# Altium PCB PWR_PCB.PcbDoc (part 2 of 3)
Units mil, origin at the board's own origin, x right, y up, seen from the top; angles counter-clockwise.
Board outline 9000 x 6000 mil, 4 copper layers (Top Layer, GND Layer, Power Layer, Bottom Layer), stack 61.811 mil thick; 125 components, 92 nets, 479 pads, 4387 vias.
Unrouted connection lines stored in the file: 22.
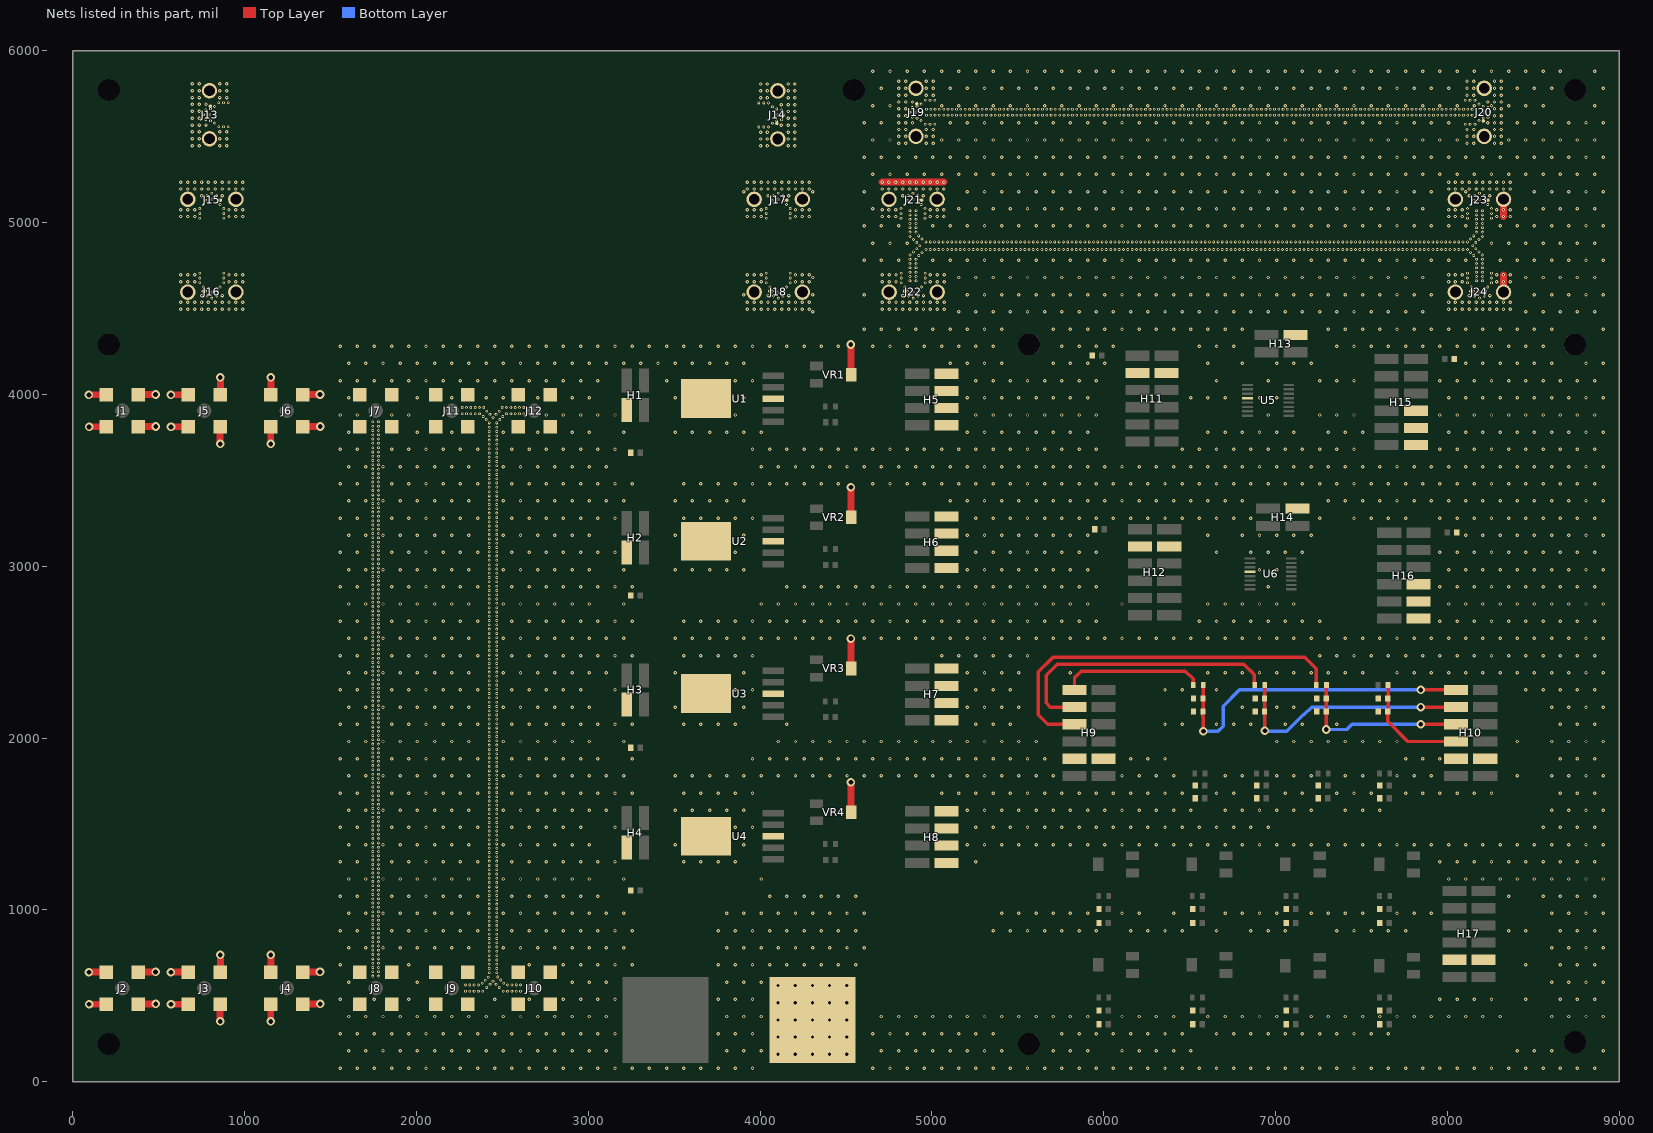
[diagram p4: the nets of this part, all layers, seen from the top]

## Via types
v1: diameter 20, hole 9, Top Layer to Bottom Layer, tented both sides, 2529 vias
v2: diameter 16, hole 8, Top Layer to Bottom Layer, 1158 vias
v3: diameter 20, hole 8, Top Layer to Bottom Layer, tented both sides, 408 vias
v4: diameter 16, hole 8, Top Layer to Bottom Layer, tented both sides, 156 vias
v5: diameter 50, hole 28, Top Layer to Bottom Layer, 70 vias
v6: diameter 30, hole 19, Top Layer to Bottom Layer, 50 vias
v7: diameter 80, hole 50, Top Layer to Bottom Layer, 16 vias

## Nets (pads, with @x,y where several pads share a name; then routed paths per layer and width w, separated by ;. In a path a pad name is that pad's centre, name@x,y a point inside that pad or via, vN(x,y) a via of type N, cw(c..) or ccw(c..) an arc to the next point about the centre after c; other vN are vias at no path point) (continued)
GND: C1.1 C2.1 C3.1 C4.1 C9.1 C10.1 C11.1 C12.1 C13.1 C14.1 C15.1 C16.1 C17.1 C18.1 C19.1 C20.1 C21.1 C22.1 C23.1 C24.1 C25.1 C26.1 C27.1 C28.1 C29.1 C30.1 C31.1 C32.1 C33.1 C34.1 C35.1 C36.1 C37.1 C38.1 C39.1 C40.1 C41.1 C42.1 C43.1 C44.1 H1.1 H2.1 H3.1 H4.1 H5.1 H5.3 H5.5 H5.7 H6.1 H6.3 H6.5 H6.7 H7.1 H7.3 H7.5 H7.7 H8.1 H8.3 H8.5 H8.7 H9.5 H9.11 H10.5 H10.11 H11.5 H11.11 H12.5 H12.11 H13.3 H14.3 H15.1 H15.2 H15.3 H16.1 H16.2 H16.3 H17.5 H17.11 J1.2 J1.3 J1.4 J1.5 J2.2 J2.3 J2.4 J2.5 J3.2 J3.3 J3.4 J3.5 J4.2 J4.3 J4.4 J4.5 J5.2 J5.3 J5.4 J5.5 J6.2 J6.3 J6.4 J6.5 J7.2 J7.3 J7.4 J7.5 J8.2 J8.3 J8.4 J8.5 J9.2 J9.3 J9.4 J9.5 J10.2 J10.3 J10.4 J10.5 J11.2 J11.3 J11.4 J11.5 J12.2 J12.3 J12.4 J12.5 J13.1 J13.2 J13.4 J14.1 J14.2 J14.4 J15.1 J15.2 J15.4 J16.1 J16.2 J16.4 J17.1 J17.2 J17.4 J18.1 J18.2 J18.4 J19.1 J19.2 J19.4 J20.1 J20.2 J20.4 J21.1 J21.2 J21.4 J22.1 J22.2 J22.4 J23.1 J23.2 J23.4 J24.1 J24.2 J24.4 P2.1 U1.3 U1.6 U2.3 U2.6 U3.3 U3.6 U4.3 U4.6 U5.12 U6.12 VR1.2 VR2.2 VR3.2 VR4.2 | length 3672.3
  Top Layer w40: v5(94.75,637) 95.5,637.75 194.75,637.75 J2.2@195.5,638.5 ; v5(94.75,3997) 95.5,3997.75 194.75,3997.75 J1.2@195.5,3998.5 ; v5(95.5,450.75) 96.25,451.5 J2.5@195.5,451.5 ; v5(95.5,3810.75) 96.25,3811.5 J1.5@195.5,3811.5 ; J2.4@382.5,451.5 383.25,452.25 482.5,452.25 v5(483.25,453) ; J2.3@382.5,638.5 481.75,638.5 v5(482.5,639.25) ; J1.4@382.5,3811.5 383.25,3812.25 482.5,3812.25 v5(483.25,3813) ; J1.3@382.5,3998.5 481.75,3998.5 v5(482.5,3999.25) ; v5(571.75,637) 572.5,637.75 671.75,637.75 J3.3@672.5,638.5 ; v5(571.75,3997) 572.5,3997.75 671.75,3997.75 J5.3@672.5,3998.5 ; v5(572.5,450.75) 573.25,451.5 J3.2@672.5,451.5 ; v5(572.5,3810.75) 573.25,3811.5 J5.2@672.5,3811.5 ; J3.5@858.52,451.5 858.52,352.25 v5(859.27,351.5) ; J5.5@858.52,3811.5 858.52,3712.25 v5(859.27,3711.5) ; v5(858.75,738.5) 859.5,737.75 J3.4@859.5,638.5 ; v5(858.75,4098.5) 859.5,4097.75 J5.4@859.5,3998.5 ; J4.2@1152.5,451.5 1152.5,352.25 v5(1153.25,351.5) ; J6.2@1152.5,3811.5 1152.5,3712.25 v5(1153.25,3711.5) ; v5(1152.73,738.5) 1153.48,737.75 J4.3@1153.48,638.5 ; v5(1152.73,4098.5) 1153.48,4097.75 J6.3@1153.48,3998.5 ; J4.5@1339.5,451.5 1340.25,452.25 1439.5,452.25 v5(1440.25,453) ; J4.4@1339.5,638.5 1438.75,638.5 v5(1439.5,639.25) ; J6.5@1339.5,3811.5 1340.25,3812.25 1439.5,3812.25 v5(1440.25,3813) ; J6.4@1339.5,3998.5 1438.75,3998.5 v5(1439.5,3999.25) ; v5(4527.5,4290) 4528.48,4289.02 4528.48,4115.98 VR1.2@4529.47,4115 ; VR4.2@4529.47,1568.92 v5@4529.47,1741.95 ; VR3.2@4529.47,2405 v5@4529.47,2578.03 ; VR2.2@4529.47,3285 v5@4529.47,3458.03 ; v3(4710,5235) v3(4750,5235) v3(4790,5235) v3(4830,5235) v3(4870,5235) v3(4910,5235) v3(4950,5235) v3(4990,5235) v3(5030,5235) v3(5070,5235) ; J21.4@4750,5135 J21.4@4750.5,5134.5 ; J22.1@4750.5,4595.5 J22.1@4751,4595 ; J24.4@8326,4595 v3(8326,4655) v3(8326,4695) ; v3(8326,5035) v3(8326,5075) J23.1@8326,5135
  other v1: 1556,80 1656,80 1756,80 1856,80 1956,80 2056,80 2156,80 2256,80 2356,80 2456,80 2556,80 2656,80 2756,80 2856,80 2956,80 3056,80 3156,80 3256,80 3356,80 3456,80 3556,80 3656,80 3756,80 3856,80 3956,80 4656,80 4756,80 4856,80 4956,80 5056,80 5156,80 5256,80 5356,80 5456,80 5556,80 5656,80 5756,80 5856,80 5956,80 6056,80 6156,80 6256,80 6356,80 6456,80 6556,80 6656,80 6756,80 6856,80 6956,80 7056,80 7156,80 7256,80 7356,80 7456,80 7556,80 7656,80 7756,80 7856,80 7956,80 8056,80 8156,80 8256,80 8356,80 8456,80 8556,80 8656,80 8756,80 8856,80 1606,180 1706,180 1806,180 1906,180 2006,180 2106,180 2206,180 2306,180 2406,180 2506,180 2606,180 2706,180 2806,180 2906,180 3006,180 3106,180 3806,180 3906,180 4006,180 4706,180 4806,180 4906,180 5006,180 5106,180 5206,180 5306,180 5406,180 5706,180 5806,180 5906,180 6106,180 6206,180 6306,180 6406,180 6506,180 8406,180 8506,180 8606,180 8906,180 1556,280 1656,280 1756,280 1856,280 1956,280 2056,280 2156,280 2256,280 2356,280 2456,280 2556,280 2656,280 2756,280 2856,280 2956,280 3056,280 3156,280 3756,280 3856,280 3956,280 4656,280 4756,280 4856,280 4956,280 5056,280 5156,280 5256,280 5356,280 5756,280 5856,280 5956,280 6056,280 6156,280 6256,280 6356,280 6456,280 6656,280 6756,280 6856,280 6956,280 7056,280 7156,280 7256,280 7356,280 7456,280 7556,280 7656,280 1606,380 1706,380 1806,380 1906,380 2006,380 2106,380 2206,380 2306,380 2406,380 2506,380 2606,380 2706,380 2806,380 2906,380 3006,380 3106,380 3806,380 3906,380 4006,380 4706,380 4806,380 4906,380 5006,380 5106,380 5206,380 5306,380 5406,380 5506,380 5606,380 5706,380 5806,380 5906,380 6106,380 6206,380 6306,380 6406,380 6606,380 6706,380 6806,380 6906,380 7006,380 7206,380 7306,380 7406,380 7506,380 7606,380 7706,380 7806,380 7906,380 8006,380 8106,380 8206,380 8306,380 8606,380 8706,380 8806,380 8906,380 1556,480 1756,480 1956,480 2456,480 2656,480 2856,480 2956,480 3056,480 3156,480 3756,480 3856,480 3956,480 7956,480 8056,480 8156,480 8256,480 8456,480 8656,480 8756,480 8856,480 1606,580 2006,580 2906,580 3006,580 3106,580 3806,580 3906,580 4006,580 8606,580 8706,580 8806,580 8906,580 1556,680 1956,680 2656,680 2856,680 2956,680 3056,680 3156,680 3256,680 3756,680 3856,680 3956,680 4056,680 4156,680 4256,680 4356,680 4456,680 4556,680 8456,680 8656,680 8756,680 8856,680 1606,780 1706,780 1806,780 1906,780 2006,780 2106,780 2206,780 2306,780 2506,780 2606,780 2706,780 2806,780 2906,780 3006,780 3106,780 3206,780 3806,780 3906,780 4006,780 4106,780 4206,780 4306,780 4406,780 4506,780 4606,780 8606,780 8706,780 8806,780 8906,780 1556,880 1656,880 1856,880 1956,880 2056,880 2156,880 2256,880 2356,880 2556,880 2656,880 2756,880 2856,880 2956,880 3056,880 3156,880 3256,880 3756,880 3856,880 3956,880 4056,880 4156,880 4256,880 4356,880 4456,880 4556,880 5356,880 5456,880 5556,880 5656,880 5756,880 5856,880 5956,880 6156,880 6256,880 6356,880 6456,880 6656,880 6856,880 6956,880 7056,880 7356,880 7456,880 7556,880 7656,880 7756,880 8356,880 8456,880 8656,880 8756,880 8856,880 1606,980 1706,980 1806,980 1906,980 2006,980 2106,980 2206,980 2306,980 2506,980 2606,980 2706,980 2806,980 2906,980 3006,980 3106,980 3206,980 3806,980 3906,980 4006,980 4106,980 4206,980 4306,980 4406,980 4506,980 4606,980 5406,980 5506,980 5606,980 5706,980 5806,980 5906,980 6106,980 6206,980 6406,980 6706,980 6806,980 6906,980 7006,980 7206,980 7306,980 7406,980 7506,980 7706,980 7806,980 7906,980 8606,980 8706,980 8806,980 8906,980 1556,1080 1656,1080 1856,1080 1956,1080 2056,1080 2156,1080 2256,1080 2356,1080 2556,1080 2656,1080 2756,1080 2856,1080 2956,1080 3056,1080 4056,1080 4156,1080 4256,1080 4356,1080 4456,1080 4556,1080 8356,1080 8556,1080 8656,1080 8756,1080 8856,1080 1606,1180 1706,1180 1806,1180 1906,1180 2006,1180 2106,1180 2206,1180 2306,1180 2506,1180 2606,1180 2706,1180 2806,1180 2906,1180 3006,1180 3206,1180 4006,1180 8006,1180 8106,1180 8206,1180 8306,1180 8406,1180 8506,1180 8606,1180 8706,1180 8806,1180 8906,1180 1556,1280 1656,1280 1856,1280 1956,1280 2056,1280 2156,1280 2256,1280 2356,1280 2556,1280 2656,1280 2756,1280 2856,1280 2956,1280 3056,1280 3156,1280 3556,1280 3656,1280 3756,1280 3856,1280 5256,1280 7956,1280 8056,1280 8156,1280 8256,1280 8356,1280 8456,1280 8556,1280 8656,1280 8756,1280 8856,1280 1606,1380 1706,1380 1806,1380 1906,1380 2006,1380 2106,1380 2206,1380 2306,1380 2506,1380 2606,1380 2706,1380 2806,1380 2906,1380 3006,1380 3506,1380 3906,1380 5206,1380 5306,1380 5406,1380 5506,1380 5606,1380 5706,1380 5806,1380 5906,1380 6006,1380 6106,1380 6206,1380 6306,1380 6406,1380 6506,1380 6606,1380 6706,1380 6806,1380 6906,1380 7006,1380 7106,1380 7206,1380 7306,1380 7406,1380 7506,1380 7606,1380 7706,1380 7806,1380 7906,1380 8006,1380 8106,1380 8206,1380 8306,1380 8406,1380 8506,1380 8606,1380 8706,1380 8806,1380 8906,1380 1556,1480 1656,1480 1856,1480 1956,1480 2056,1480 2156,1480 2256,1480 2356,1480 2556,1480 2656,1480 2756,1480 2856,1480 2956,1480 3156,1480 3856,1480 3956,1480 5256,1480 5356,1480 5456,1480 5556,1480 5656,1480 5756,1480 5856,1480 5956,1480 6056,1480 6156,1480 6256,1480 6356,1480 6456,1480 6556,1480 6656,1480 6756,1480 6856,1480 6956,1480 8556,1480 8656,1480 8756,1480 8856,1480 1606,1580 1706,1580 1806,1580 1906,1580 2006,1580 2106,1580 2206,1580 2306,1580 2506,1580 2606,1580 2706,1580 2806,1580 2906,1580 3006,1580 3106,1580 3506,1580 3606,1580 3706,1580 3806,1580 3906,1580 5206,1580 5306,1580 5406,1580 5506,1580 5606,1580 5706,1580 5806,1580 5906,1580 6006,1580 6106,1580 6206,1580 6306,1580 6406,1580 6506,1580 6706,1580 6806,1580 6906,1580 7006,1580 7106,1580 7206,1580 7406,1580 7506,1580 7606,1580 8606,1580 8706,1580 8806,1580 8906,1580 1556,1680 1656,1680 1856,1680 1956,1680 2056,1680 2156,1680 2256,1680 2356,1680 2556,1680 2656,1680 2756,1680 2856,1680 2956,1680 3056,1680 3156,1680 3256,1680 3556,1680 3656,1680 3756,1680 3856,1680 3956,1680 5056,1680 5156,1680 5256,1680 5356,1680 5456,1680 5556,1680 5656,1680 5756,1680 5856,1680 5956,1680 6056,1680 6156,1680 6256,1680 6356,1680 6456,1680 6656,1680 6756,1680 7056,1680 7156,1680 7356,1680 7456,1680 7556,1680 7756,1680 7856,1680 7956,1680 8056,1680 8156,1680 8256,1680 8656,1680 8756,1680 8856,1680 1606,1780 1706,1780 1806,1780 1906,1780 2006,1780 2106,1780 2206,1780 2306,1780 2506,1780 2606,1780 2706,1780 2806,1780 2906,1780 3006,1780 3106,1780 3206,1780 3506,1780 3606,1780 3706,1780 3806,1780 3906,1780 4006,1780 4106,1780 4206,1780 4306,1780 4406,1780 4506,1780 4606,1780 4706,1780 4806,1780 4906,1780 5006,1780 5106,1780 5206,1780 5306,1780 5406,1780 5506,1780 5606,1780 5706,1780 6106,1780 6206,1780 6306,1780 6406,1780 6706,1780 6806,1780 7006,1780 7106,1780 7206,1780 7406,1780 7506,1780 7706,1780 7806,1780 7906,1780 8406,1780 8606,1780 8706,1780 8806,1780 8906,1780 1556,1880 1656,1880 1856,1880 1956,1880 2056,1880 2156,1880 2256,1880 2356,1880 2556,1880 2656,1880 2756,1880 2856,1880 2956,1880 3056,1880 3256,1880 3956,1880 4056,1880 4156,1880 4256,1880 4356,1880 4456,1880 4556,1880 4656,1880 4756,1880 4856,1880 4956,1880 5056,1880 5156,1880 5256,1880 5356,1880 5456,1880 5556,1880 5656,1880 6156,1880 6256,1880 6356,1880 7756,1880 7856,1880 7956,1880 8656,1880 8756,1880 8856,1880 1606,1980 1706,1980 1806,1980 1906,1980 2006,1980 2106,1980 2206,1980 2306,1980 2506,1980 2606,1980 2706,1980 2806,1980 2906,1980 3006,1980 3206,1980 4106,1980 4206,1980 4306,1980 4406,1980 4506,1980 4606,1980 4706,1980 4806,1980 4906,1980 5006,1980 5106,1980 5206,1980 5306,1980 5406,1980 5506,1980 5606,1980 7006,1980 7106,1980 7206,1980 7306,1980 7406,1980 7506,1980 7606,1980 7706,1980 8406,1980 8606,1980 8706,1980 8806,1980 8906,1980 1556,2080 1656,2080 1856,2080 1956,2080 2056,2080 2156,2080 2256,2080 2356,2080 2556,2080 2656,2080 2756,2080 2856,2080 2956,2080 3056,2080 3156,2080 3256,2080 3556,2080 3656,2080 3756,2080 3856,2080 4156,2080 5256,2080 5356,2080 5456,2080 6356,2080 6456,2080 6656,2080 6756,2080 6856,2080 7056,2080 7156,2080 7356,2080 8656,2080 8756,2080 8856,2080 1606,2180 1706,2180 1806,2180 1906,2180 2006,2180 2106,2180 2206,2180 2306,2180 2506,2180 2606,2180 2706,2180 2806,2180 2906,2180 3006,2180 3506,2180 3906,2180 5206,2180 5306,2180 5406,2180 5506,2180 6806,2180 7006,2180 7106,2180 8606,2180 8706,2180 8806,2180 8906,2180 1556,2280 1656,2280 1856,2280 1956,2280 2056,2280 2156,2280 2256,2280 2356,2280 2556,2280 2656,2280 2756,2280 2856,2280 2956,2280 3156,2280 3856,2280 3956,2280 5256,2280 5356,2280 5456,2280 6356,2280 6456,2280 6656,2280 8456,2280 8556,2280 8656,2280 8756,2280 8856,2280 1606,2380 1706,2380 1806,2380 1906,2380 2006,2380 2106,2380 2206,2380 2306,2380 2506,2380 2606,2380 2706,2380 2806,2380 2906,2380 3006,2380 3106,2380 3506,2380 3906,2380 5206,2380 5306,2380 5406,2380 5506,2380 5806,2380 6606,2380 6706,2380 6806,2380 6906,2380 7006,2380 7106,2380 7206,2380 7306,2380 7406,2380 7506,2380 7706,2380 7806,2380 7906,2380 8006,2380 8106,2380 8206,2380 8306,2380 8406,2380 8506,2380 8606,2380 8706,2380 8806,2380 8906,2380 1556,2480 1656,2480 1856,2480 1956,2480 2056,2480 2156,2480 2256,2480 2356,2480 2556,2480 2656,2480 2756,2480 2856,2480 2956,2480 3056,2480 3156,2480 3256,2480 3556,2480 3656,2480 3756,2480 3856,2480 3956,2480 5056,2480 5156,2480 5256,2480 5356,2480 5456,2480 5556,2480 7256,2480 7356,2480 7456,2480 7556,2480 7656,2480 7756,2480 7856,2480 7956,2480 8056,2480 8156,2480 8256,2480 8356,2480 8456,2480 8556,2480 8656,2480 8756,2480 8856,2480 1606,2580 1706,2580 1806,2580 1906,2580 2006,2580 2106,2580 2206,2580 2306,2580 2506,2580 2606,2580 2706,2580 2806,2580 2906,2580 3006,2580 3106,2580 3206,2580 3506,2580 3606,2580 3706,2580 3806,2580 3906,2580 4006,2580 4106,2580 4206,2580 4306,2580 4406,2580 4606,2580 4706,2580 4806,2580 4906,2580 5006,2580 5106,2580 5206,2580 5306,2580 5406,2580 5506,2580 5606,2580 5706,2580 5806,2580 5906,2580 6006,2580 6106,2580 6206,2580 6306,2580 6406,2580 6506,2580 6606,2580 6706,2580 6806,2580 6906,2580 7006,2580 7106,2580 7206,2580 7306,2580 7406,2580 7506,2580 7606,2580 7706,2580 7806,2580 7906,2580 8006,2580 8106,2580 8206,2580 8306,2580 8406,2580 8506,2580 8606,2580 8706,2580 8806,2580 8906,2580 1556,2680 1656,2680 1856,2680 1956,2680 2056,2680 2156,2680 2256,2680 2356,2680 2556,2680 2656,2680 2756,2680 2856,2680 2956,2680 3056,2680 3156,2680 3256,2680 3556,2680 3656,2680 3756,2680 3856,2680 3956,2680 4056,2680 4156,2680 4256,2680 4356,2680 4456,2680 4556,2680 4656,2680 4756,2680 4856,2680 4956,2680 5056,2680 5156,2680 5256,2680 5356,2680 5456,2680 5556,2680 5656,2680 5756,2680 5856,2680 5956,2680 6556,2680 6656,2680 6756,2680 6856,2680 6956,2680 7056,2680 7156,2680 7256,2680 7956,2680 8056,2680 8156,2680 8256,2680 8356,2680 8456,2680 8556,2680 8656,2680 8756,2680 8856,2680 1606,2780 1706,2780 1806,2780 1906,2780 2006,2780 2106,2780 2206,2780 2306,2780 2506,2780 2606,2780 2706,2780 2806,2780 2906,2780 3006,2780 3206,2780 4006,2780 4106,2780 4206,2780 4306,2780 4406,2780 4506,2780 4606,2780 4706,2780 4806,2780 4906,2780 5006,2780 5106,2780 5206,2780 5306,2780 5406,2780 5506,2780 5606,2780 5706,2780 5806,2780 5906,2780 6106,2780 6606,2780 6706,2780 6806,2780 6906,2780 7006,2780 7106,2780 8006,2780 8106,2780 8206,2780 8306,2780 8406,2780 8506,2780 8606,2780 8706,2780 8806,2780 8906,2780 1556,2880 1656,2880 1856,2880 1956,2880 2056,2880 2156,2880 2256,2880 2356,2880 2556,2880 2656,2880 2756,2880 2856,2880 2956,2880 3056,2880 3156,2880 3256,2880 4156,2880 4256,2880 4356,2880 4456,2880 4556,2880 4656,2880 4756,2880 4856,2880 4956,2880 5056,2880 5156,2880 5256,2880 5356,2880 5456,2880 5556,2880 5656,2880 5756,2880 5856,2880 5956,2880 6956,2880 7956,2880 8056,2880 8156,2880 8256,2880 8356,2880 8456,2880 8556,2880 8656,2880 8756,2880 8856,2880 1606,2980 1706,2980 1806,2980 1906,2980 2006,2980 2106,2980 2206,2980 2306,2980 2506,2980 2606,2980 2706,2980 2806,2980 2906,2980 3006,2980 3206,2980 3506,2980 3606,2980 3706,2980 3806,2980 3906,2980 5206,2980 5306,2980 5406,2980 5506,2980 5606,2980 5706,2980 5806,2980 5906,2980 6906,2980 7006,2980 8006,2980 8106,2980 8206,2980 8306,2980 8406,2980 8506,2980 8606,2980 8706,2980 8806,2980 8906,2980 1556,3080 1656,3080 1856,3080 1956,3080 2056,3080 2156,3080 2256,3080 2356,3080 2556,3080 2656,3080 2756,3080 2856,3080 2956,3080 3056,3080 3156,3080 3856,3080 5256,3080 5356,3080 5456,3080 5556,3080 5656,3080 5756,3080 5856,3080 5956,3080 6656,3080 6856,3080 6956,3080 7056,3080 7156,3080 7956,3080 8056,3080 8156,3080 8256,3080 8356,3080 8456,3080 8556,3080 8656,3080 8756,3080 8856,3080 1606,3180 1706,3180 1806,3180 1906,3180 2006,3180 2106,3180 2206,3180 2306,3180 2506,3180 2606,3180 2706,3180 2806,3180 2906,3180 3006,3180 3506,3180 3906,3180 5206,3180 5306,3180 5406,3180 5506,3180 5606,3180 5706,3180 5806,3180 5906,3180 6606,3180 6806,3180 6906,3180 7006,3180 7106,3180 7206,3180 8106,3180 8206,3180 8306,3180 8406,3180 8506,3180 8606,3180 8706,3180 8806,3180 8906,3180 1556,3280 1656,3280 1856,3280 1956,3280 2056,3280 2156,3280 2256,3280 2356,3280 2556,3280 2656,3280 2756,3280 2856,3280 2956,3280 3056,3280 3156,3280 3556,3280 3656,3280 3756,3280 3856,3280 3956,3280 5256,3280 5356,3280 5456,3280 5556,3280 5656,3280 5756,3280 5856,3280 5956,3280 6056,3280 6156,3280 6256,3280 6356,3280 6456,3280 6556,3280 6656,3280 6756,3280 6856,3280 7256,3280 7456,3280 7556,3280 7656,3280 7756,3280 7956,3280 8056,3280 8156,3280 8256,3280 8356,3280 8456,3280 8556,3280 8656,3280 8756,3280 8856,3280 1606,3380 1706,3380 1806,3380 1906,3380 2006,3380 2106,3380 2206,3380 2306,3380 2506,3380 2606,3380 2706,3380 2806,3380 2906,3380 3006,3380 3106,3380 3206,3380 3506,3380 3606,3380 3706,3380 3806,3380 3906,3380 5106,3380 5206,3380 5306,3380 5406,3380 5506,3380 5606,3380 5706,3380 5806,3380 5906,3380 6006,3380 6106,3380 6206,3380 6306,3380 6406,3380 6506,3380 6606,3380 6706,3380 6806,3380 7306,3380 7406,3380 7506,3380 7606,3380 7706,3380 7806,3380 7906,3380 8006,3380 8106,3380 8206,3380 8306,3380 8406,3380 8506,3380 8606,3380 8706,3380 8806,3380 8906,3380 1556,3480 1656,3480 1856,3480 1956,3480 2056,3480 2156,3480 2256,3480 2356,3480 2556,3480 2656,3480 2756,3480 2856,3480 2956,3480 3056,3480 3156,3480 3256,3480 3556,3480 3656,3480 3756,3480 3856,3480 3956,3480 4056,3480 4156,3480 4256,3480 4356,3480 4456,3480 4656,3480 4756,3480 4856,3480 4956,3480 5056,3480 5156,3480 5256,3480 5356,3480 5456,3480 5556,3480 5656,3480 5756,3480 5856,3480 5956,3480 6056,3480 6156,3480 6256,3480 6356,3480 6456,3480 6556,3480 6656,3480 6756,3480 6856,3480 6956,3480 7056,3480 7156,3480 7256,3480 7356,3480 7456,3480 7556,3480 7656,3480 7756,3480 7856,3480 7956,3480 8056,3480 8156,3480 8256,3480 8356,3480 8456,3480 8556,3480 8656,3480 8756,3480 8856,3480 1606,3580 1706,3580 1806,3580 1906,3580 2006,3580 2106,3580 2206,3580 2306,3580 2506,3580 2606,3580 2706,3580 2806,3580 2906,3580 3006,3580 3106,3580 4006,3580 4106,3580 4206,3580 4306,3580 4406,3580 4506,3580 4606,3580 4706,3580 4806,3580 4906,3580 5006,3580 5106,3580 5206,3580 5306,3580 5406,3580 5506,3580 5606,3580 5706,3580 5806,3580 5906,3580 6006,3580 6106,3580 6206,3580 6306,3580 6406,3580 6506,3580 6606,3580 6706,3580 6806,3580 6906,3580 7006,3580 7106,3580 7206,3580 7306,3580 7406,3580 7506,3580 7606,3580 7706,3580 7806,3580 7906,3580 8006,3580 8106,3580 8206,3580 8306,3580 8406,3580 8506,3580 8606,3580 8706,3580 8806,3580 8906,3580 1556,3680 1656,3680 1856,3680 1956,3680 2056,3680 2156,3680 2256,3680 2356,3680 2556,3680 2656,3680 2756,3680 2856,3680 2956,3680 3056,3680 3156,3680 3956,3680 4056,3680 4156,3680 4256,3680 4356,3680 4456,3680 4556,3680 4656,3680 4756,3680 4856,3680 4956,3680 5056,3680 5156,3680 5256,3680 5356,3680 5456,3680 5556,3680 5656,3680 5756,3680 5856,3680 5956,3680 6456,3680 6556,3680 6656,3680 6756,3680 6856,3680 6956,3680 7056,3680 7156,3680 7256,3680 7356,3680 7456,3680 7956,3680 8056,3680 8156,3680 8256,3680 8356,3680 8456,3680 8556,3680 8656,3680 8756,3680 8856,3680 1606,3780 2006,3780 2206,3780 2506,3780 2706,3780 2906,3780 3006,3780 3206,3780 3506,3780 3606,3780 3706,3780 3806,3780 3906,3780 4006,3780 5206,3780 5306,3780 5406,3780 5506,3780 5606,3780 5706,3780 5806,3780 5906,3780 6606,3780 6706,3780 6806,3780 6906,3780 7006,3780 7106,3780 7306,3780 7406,3780 7506,3780 8006,3780 8106,3780 8206,3780 8306,3780 8406,3780 8506,3780 8606,3780 8706,3780 8806,3780 8906,3780 1556,3880 1656,3880 1856,3880 1956,3880 2756,3880 2856,3880 2956,3880 3056,3880 3156,3880 3856,3880 5256,3880 5356,3880 5456,3880 5556,3880 5656,3880 5756,3880 5856,3880 5956,3880 6956,3880 7256,3880 7356,3880 7456,3880 7956,3880 8056,3880 8156,3880 8256,3880 8356,3880 8456,3880 8556,3880 8656,3880 8756,3880 8856,3880 1606,3980 2006,3980 2206,3980 2406,3980 2506,3980 2706,3980 2906,3980 3006,3980 3506,3980 3906,3980 5206,3980 5306,3980 5406,3980 5506,3980 5606,3980 5706,3980 5806,3980 5906,3980 6506,3980 6606,3980 6706,3980 6906,3980 7006,3980 8006,3980 8106,3980 8206,3980 8306,3980 8406,3980 8506,3980 8606,3980 8706,3980 8806,3980 8906,3980 1556,4080 1656,4080 1756,4080 1856,4080 1956,4080 2056,4080 2156,4080 2256,4080 2356,4080 2456,4080 2556,4080 2656,4080 2756,4080 2856,4080 2956,4080 3056,4080 3456,4080 3856,4080 3956,4080 5256,4080 5356,4080 5456,4080 5556,4080 5656,4080 5756,4080 5856,4080 5956,4080 6656,4080 6956,4080 7256,4080 7356,4080 7456,4080 7956,4080 8056,4080 8156,4080 8256,4080 8356,4080 8456,4080 8556,4080 8656,4080 8756,4080 8856,4080 1606,4180 1706,4180 1806,4180 1906,4180 2006,4180 2106,4180 2206,4180 2306,4180 2406,4180 2506,4180 2606,4180 2706,4180 2806,4180 2906,4180 3006,4180 3106,4180 3206,4180 3306,4180 3406,4180 3506,4180 3606,4180 3706,4180 3806,4180 3906,4180 5106,4180 5206,4180 5306,4180 5406,4180 5706,4180 5806,4180 5906,4180 6006,4180 6606,4180 6806,4180 7006,4180 7106,4180 7206,4180 8106,4180 8206,4180 8306,4180 8406,4180 8506,4180 8606,4180 8806,4180 8906,4180 1556,4280 1656,4280 1756,4280 1856,4280 1956,4280 2056,4280 2156,4280 2256,4280 2356,4280 2456,4280 2556,4280 2656,4280 2756,4280 2856,4280 2956,4280 3056,4280 3156,4280 3256,4280 3356,4280 3456,4280 3556,4280 3656,4280 3756,4280 3856,4280 3956,4280 4056,4280 4156,4280 4256,4280 4356,4280 4456,4280 4656,4280 4756,4280 4856,4280 4956,4280 5056,4280 5156,4280 5256,4280 5356,4280 5756,4280 5856,4280 5956,4280 6056,4280 6556,4280 6656,4280 6756,4280 7356,4280 7456,4280 7556,4280 7656,4280 7756,4280 7856,4280 7956,4280 8056,4280 8156,4280 8256,4280 8356,4280 8456,4280 8556,4280 4606,4380 4706,4380 4806,4380 4906,4380 5006,4380 5106,4380 5206,4380 5306,4380 5406,4380 5706,4380 5806,4380 5906,4380 6006,4380 6106,4380 6206,4380 6306,4380 6406,4380 6506,4380 6606,4380 6706,4380 6806,4380 7306,4380 7406,4380 7506,4380 7606,4380 7706,4380 7806,4380 7906,4380 8006,4380 8106,4380 8206,4380 8306,4380 8406,4380 8506,4380 8606,4380 8906,4380 4306,4480 5156,4480 5256,4480 5356,4480 5456,4480 5556,4480 5656,4480 5756,4480 5856,4480 5956,4480 6056,4480 6156,4480 6256,4480 6356,4480 6456,4480 6556,4480 6656,4480 6756,4480 6856,4480 6956,4480 7056,4480 7156,4480 7256,4480 7356,4480 7456,4480 7556,4480 7656,4480 7756,4480 7856,4480 8456,4480 8556,4480 8656,4480 8756,4480 8856,4480 3906,4580 4306,4580 4606,4580 5206,4580 5306,4580 5406,4580 5506,4580 5606,4580 5706,4580 5806,4580 5906,4580 6006,4580 6106,4580 6206,4580 6306,4580 6406,4580 6506,4580 6606,4580 6706,4580 6806,4580 6906,4580 7006,4580 7106,4580 7206,4580 7306,4580 7406,4580 7506,4580 7606,4580 7706,4580 7806,4580 7906,4580 8506,4580 8606,4580 8706,4580 8806,4580 8906,4580 4306,4680 5156,4680 5256,4680 5356,4680 5456,4680 5556,4680 5656,4680 5756,4680 5856,4680 5956,4680 6056,4680 6156,4680 6256,4680 6356,4680 6456,4680 6556,4680 6656,4680 6756,4680 6856,4680 6956,4680 7056,4680 7156,4680 7256,4680 7356,4680 7456,4680 7556,4680 7656,4680 7756,4680 7856,4680 8456,4680 8556,4680 8656,4680 8756,4680 8856,4680 4606,4780 4706,4780 4806,4780 5006,4780 5106,4780 5206,4780 5306,4780 5406,4780 5506,4780 5606,4780 5706,4780 5806,4780 5906,4780 6006,4780 6106,4780 6206,4780 6306,4780 6406,4780 6506,4780 6606,4780 6706,4780 6806,4780 6906,4780 7006,4780 7106,4780 7206,4780 7306,4780 7406,4780 7506,4780 7606,4780 7706,4780 7806,4780 7906,4780 8006,4780 8106,4780 8306,4780 8406,4780 8506,4780 8606,4780 8706,4780 8806,4780 8906,4780 4656,4880 4756,4880 4856,4880 8256,4880 8356,4880 8456,4880 8556,4880 8656,4880 8756,4880 8856,4880 4606,4980 4706,4980 4806,4980 5006,4980 5106,4980 5206,4980 5306,4980 5406,4980 5506,4980 5606,4980 5706,4980 5806,4980 5906,4980 6006,4980 6106,4980 6206,4980 6306,4980 6406,4980 6506,4980 6606,4980 6706,4980 6806,4980 6906,4980 7006,4980 7106,4980 7206,4980 7306,4980 7406,4980 7506,4980 7606,4980 7706,4980 7806,4980 7906,4980 8006,4980 8106,4980 8306,4980 8406,4980 8506,4980 8606,4980 8706,4980 8806,4980 8906,4980 4656,5080 5156,5080 5256,5080 5356,5080 5456,5080 5556,5080 5656,5080 5756,5080 5856,5080 5956,5080 6056,5080 6156,5080 6256,5080 6356,5080 6456,5080 6556,5080 6656,5080 6756,5080 6856,5080 6956,5080 7056,5080 7156,5080 7256,5080 7356,5080 7456,5080 7556,5080 7656,5080 7756,5080 7856,5080 8456,5080 8556,5080 8656,5080 8756,5080 8856,5080 3906,5180 4306,5180 4606,5180 5206,5180 5306,5180 5406,5180 5506,5180 5606,5180 5706,5180 5806,5180 5906,5180 6006,5180 6106,5180 6206,5180 6306,5180 6406,5180 6506,5180 6606,5180 6706,5180 6806,5180 6906,5180 7006,5180 7106,5180 7206,5180 7306,5180 7406,5180 7506,5180 7606,5180 7706,5180 7806,5180 7906,5180 8106,5180 8506,5180 8606,5180 8706,5180 8806,5180 8906,5180 4656,5280 4756,5280 4856,5280 4956,5280 5056,5280 5156,5280 5256,5280 5356,5280 5456,5280 5556,5280 5656,5280 5756,5280 5856,5280 5956,5280 6056,5280 6156,5280 6256,5280 6356,5280 6456,5280 6556,5280 6656,5280 6756,5280 6856,5280 6956,5280 7056,5280 7156,5280 7256,5280 7356,5280 7456,5280 7556,5280 7656,5280 7756,5280 7856,5280 7956,5280 8056,5280 8156,5280 8256,5280 8356,5280 8456,5280 8556,5280 8656,5280 8756,5280 8856,5280 4606,5380 4706,5380 4806,5380 4906,5380 5006,5380 5106,5380 5206,5380 5306,5380 5406,5380 5506,5380 5606,5380 5706,5380 5806,5380 5906,5380 6006,5380 6106,5380 6206,5380 6306,5380 6406,5380 6506,5380 6606,5380 6706,5380 6806,5380 6906,5380 7006,5380 7106,5380 7206,5380 7306,5380 7406,5380 7506,5380 7606,5380 7706,5380 7806,5380 7906,5380 8006,5380 8106,5380 8206,5380 8306,5380 8406,5380 8506,5380 8606,5380 8706,5380 8806,5380 8906,5380 4656,5480 4756,5480 5056,5480 5156,5480 5256,5480 5356,5480 5456,5480 5556,5480 5656,5480 5756,5480 5856,5480 5956,5480 6056,5480 6156,5480 6256,5480 6356,5480 6456,5480 6556,5480 6656,5480 6756,5480 6856,5480 6956,5480 7056,5480 7156,5480 7256,5480 7356,5480 7456,5480 7556,5480 7656,5480 7756,5480 7856,5480 7956,5480 8056,5480 8356,5480 8456,5480 8556,5480 8656,5480 8756,5480 8856,5480 4606,5580 4706,5580 5106,5580 5206,5580 5306,5580 5406,5580 5506,5580 5606,5580 5706,5580 5806,5580 5906,5580 6006,5580 6106,5580 6206,5580 6306,5580 6406,5580 6506,5580 6606,5580 6706,5580 6806,5580 6906,5580 7006,5580 7106,5580 7206,5580 7306,5580 7406,5580 7506,5580 7606,5580 7706,5580 7806,5580 7906,5580 8006,5580 8406,5580 8506,5580 8606,5580 8706,5580 8806,5580 8906,5580 4656,5680 4756,5680 5056,5680 5156,5680 5256,5680 5356,5680 5456,5680 5556,5680 5656,5680 5756,5680 5856,5680 5956,5680 6056,5680 6156,5680 6256,5680 6356,5680 6456,5680 6556,5680 6656,5680 6756,5680 6856,5680 6956,5680 7056,5680 7156,5680 7256,5680 7356,5680 7456,5680 7556,5680 7656,5680 7756,5680 7856,5680 7956,5680 8056,5680 8156,5680 8256,5680 8356,5680 8456,5680 8556,5680 8856,5680 4706,5780 5106,5780 5206,5780 5306,5780 5406,5780 5506,5780 5606,5780 5706,5780 5806,5780 5906,5780 6006,5780 6106,5780 6206,5780 6306,5780 6406,5780 6506,5780 6606,5780 6706,5780 6806,5780 6906,5780 7006,5780 7106,5780 7206,5780 7306,5780 7406,5780 7506,5780 7606,5780 7706,5780 7806,5780 7906,5780 8006,5780 8406,5780 8506,5780 8606,5780 8906,5780 4656,5880 4756,5880 4856,5880 4956,5880 5056,5880 5156,5880 5256,5880 5356,5880 5456,5880 5556,5880 5656,5880 5756,5880 5856,5880 5956,5880 6056,5880 6156,5880 6256,5880 6356,5880 6456,5880 6556,5880 6656,5880 6756,5880 6856,5880 6956,5880 7056,5880 7156,5880 7256,5880 7356,5880 7456,5880 7556,5880 7656,5880 7756,5880 7856,5880 7956,5880 8056,5880 8156,5880 8256,5880 8356,5880 8456,5880 8556,5880 8656,5880 8856,5880
  other v2: 2286,527 2311,527 2336,527 2361,527 2386,527 2506,527 2531,527 2556,527 2581,527 2606,527 2410,549 2482,549 2286,563 2311,563 2336,563 2361,563 2531,563 2556,563 2581,563 2606,563 2428,567 2464,567 2383,573 2509,574 2446,585 2401,591 2491,592 2419,609 2473,610 1745.75,615 1780.25,615 2424,634 2468,634 1745.75,640 1780.25,640 2424,659 2468,659 1745.75,665 1780.25,665 2424,684 2468,684 1745.75,690 1780.25,690 2424,709 2468,709 1745.75,715 1780.25,715 2424,734 2468,734 1745.75,740 1780.25,740 2424,759 2468,759 1745.75,765 1780.25,765 2424,784 2468,784 1745.75,790 1780.25,790 2424,809 2468,809 1745.75,815 1780.25,815 2424,834 2468,834 1745.75,840 1780.25,840 2424,859 2468,859 1745.75,865 1780.25,865 2424,884 2468,884 1745.75,890 1780.25,890 2424,909 2468,909 1745.75,915 1780.25,915 2424,934 2468,934 1745.75,940 1780.25,940 2424,959 2468,959 1745.75,965 1780.25,965 2424,984 2468,984 1745.75,990 1780.25,990 2424,1009 2468,1009 1745.75,1015 1780.25,1015 2424,1034 2468,1034 1745.75,1040 1780.25,1040 2424,1059 2468,1059 1745.75,1065 1780.25,1065 2424,1084 2468,1084 1745.75,1090 1780.25,1090 2424,1109 2468,1109 1745.75,1115 1780.25,1115 2424,1134 2468,1134 1745.75,1140 1780.25,1140 2424,1159 2468,1159 1745.75,1165 1780.25,1165 2424,1184 2468,1184 1745.75,1190 1780.25,1190 2424,1209 2468,1209 1745.75,1215 1780.25,1215 2424,1234 2468,1234 1745.75,1240 1780.25,1240 2424,1259 2468,1259 1745.75,1265 1780.25,1265 2424,1284 2468,1284 1745.75,1290 1780.25,1290 2424,1309 2468,1309 1745.75,1315 1780.25,1315 2424,1334 2468,1334 1745.75,1340 1780.25,1340 2424,1359 2468,1359 1745.75,1365 1780.25,1365 2424,1384 2468,1384 1745.75,1390 1780.25,1390 2424,1409 2468,1409 1745.75,1415 1780.25,1415 2424,1434 2468,1434 1745.75,1440 1780.25,1440 2424,1459 2468,1459 1745.75,1465 1780.25,1465 2424,1484 2468,1484 1745.75,1490 1780.25,1490 2424,1509 2468,1509 1745.75,1515 1780.25,1515 2424,1534 2468,1534 1745.75,1540 1780.25,1540 2424,1559 2468,1559 1745.75,1565 1780.25,1565 2424,1584 2468,1584 1745.75,1590 1780.25,1590 2424,1609 2468,1609 1745.75,1615 1780.25,1615 2424,1634 2468,1634 1745.75,1640 1780.25,1640 2424,1659 2468,1659 1745.75,1665 1780.25,1665 2424,1684 2468,1684 1745.75,1690 1780.25,1690 2424,1709 2468,1709 1745.75,1715 1780.25,1715 2424,1734 2468,1734 1745.75,1740 1780.25,1740 2424,1759 2468,1759 1745.75,1765 1780.25,1765 2424,1784 2468,1784 1745.75,1790 1780.25,1790 2424,1809 2468,1809 1745.75,1815 1780.25,1815 2424,1834 2468,1834 1745.75,1840 1780.25,1840 2424,1859 2468,1859 1745.75,1865 1780.25,1865 2424,1884 2468,1884 1745.75,1890 1780.25,1890 2424,1909 2468,1909 1745.75,1915 1780.25,1915 2424,1934 2468,1934 1745.75,1940 1780.25,1940 2424,1959 2468,1959 1745.75,1965 1780.25,1965 2424,1984 2468,1984 1745.75,1990 1780.25,1990 2424,2009 2468,2009 1745.75,2015 1780.25,2015 2424,2034 2468,2034 1745.75,2040 1780.25,2040 2424,2059 2468,2059 1745.75,2065 1780.25,2065 2424,2084 2468,2084 1745.75,2090 1780.25,2090 2424,2109 2468,2109 1745.75,2115 1780.25,2115 2424,2134 2468,2134 1745.75,2140 1780.25,2140 2424,2159 2468,2159 1745.75,2165 1780.25,2165 2424,2184 2468,2184 1745.75,2190 1780.25,2190 2424,2209 2468,2209 1745.75,2215 1780.25,2215 2424,2234 2468,2234 1745.75,2240 1780.25,2240 2424,2259 2468,2259 1745.75,2265 1780.25,2265 2424,2284 2468,2284 1745.75,2290 1780.25,2290 2424,2309 2468,2309 1745.75,2315 1780.25,2315 2424,2334 2468,2334 1745.75,2340 1780.25,2340 2424,2359 2468,2359 1745.75,2365 1780.25,2365 2424,2384 2468,2384 1745.75,2390 1780.25,2390 2424,2409 2468,2409 1745.75,2415 1780.25,2415 2424,2434 2468,2434 1745.75,2440 1780.25,2440 2424,2459 2468,2459 1745.75,2465 1780.25,2465 2424,2484 2468,2484 1745.75,2490 1780.25,2490 2424,2509 2468,2509 1745.75,2515 1780.25,2515 2424,2534 2468,2534 1745.75,2540 1780.25,2540 2424,2559 2468,2559 1745.75,2565 1780.25,2565 2424,2584 2468,2584 1745.75,2590 1780.25,2590 2424,2609 2468,2609 1745.75,2615 1780.25,2615 2424,2634 2468,2634 1745.75,2640 1780.25,2640 2424,2659 2468,2659 1745.75,2665 1780.25,2665 2424,2684 2468,2684 1745.75,2690 1780.25,2690 2424,2709 2468,2709 1745.75,2715 1780.25,2715 2424,2734 2468,2734 1745.75,2740 1780.25,2740 2424,2759 2468,2759 1745.75,2765 1780.25,2765 2424,2784 2468,2784 1745.75,2790 1780.25,2790 2424,2809 2468,2809 1745.75,2815 1780.25,2815 2424,2834 2468,2834 1745.75,2840 1780.25,2840 2424,2859 2468,2859 1745.75,2865 1780.25,2865 2424,2884 2468,2884 1745.75,2890 1780.25,2890 2424,2909 2468,2909 1745.75,2915 1780.25,2915 2424,2934 2468,2934 1745.75,2940 1780.25,2940 2424,2959 2468,2959 1745.75,2965 1780.25,2965 2424,2984 2468,2984 1745.75,2990 1780.25,2990 2424,3009 2468,3009 1745.75,3015 1780.25,3015 2424,3034 2468,3034 1745.75,3040 1780.25,3040 2424,3059 2468,3059 1745.75,3065 1780.25,3065 2424,3084 2468,3084 1745.75,3090 1780.25,3090 2424,3109 2468,3109 1745.75,3115 1780.25,3115 2424,3134 2468,3134 1745.75,3140 1780.25,3140 2424,3159 2468,3159 1745.75,3165 1780.25,3165 2424,3184 2468,3184 1745.75,3190 1780.25,3190 2424,3209 2468,3209 1745.75,3215 1780.25,3215 2424,3234 2468,3234 1745.75,3240 1780.25,3240 2424,3259 2468,3259 1745.75,3265 1780.25,3265 2424,3284 2468,3284 1745.75,3290 1780.25,3290 2424,3309 2468,3309 1745.75,3315 1780.25,3315 2424,3334 2468,3334 1745.75,3340 1780.25,3340 2424,3359 2468,3359 1745.75,3365 1780.25,3365 2424,3384 2468,3384 1745.75,3390 1780.25,3390 2424,3409 2468,3409 1745.75,3415 1780.25,3415 2424,3434 2468,3434 1745.75,3440 1780.25,3440 2424,3459 2468,3459 1745.75,3465 1780.25,3465 2424,3484 2468,3484 1745.75,3490 1780.25,3490 2424,3509 2468,3509 1745.75,3515 1780.25,3515 2424,3534 2468,3534 1745.75,3540 1780.25,3540 2424,3559 2468,3559 1745.75,3565 1780.25,3565 2424,3584 2468,3584 1745.75,3590 1780.25,3590 2424,3609 2468,3609 1745.75,3615 1780.25,3615 2424,3634 2468,3634 1745.75,3640 1780.25,3640 2424,3659 2468,3659 1745.75,3665 1780.25,3665 2424,3684 2468,3684 1745.75,3690 1780.25,3690 2424,3709 2468,3709 1745.75,3715 1780.25,3715 2424,3734 2468,3734 1745.75,3740 1780.25,3740 2424,3759 2468,3759 1745.75,3765 1780.25,3765 2424,3784 2468,3784 1745.75,3790 1780.25,3790 2424,3809 2468,3809 1745.75,3815 1780.25,3815 2424,3834 2468,3834 1745.75,3840 1780.25,3840 2407,3853 2485,3853 2446,3866 2389,3871 2503,3871 2428,3884 2464,3884 2267,3887 2292,3887 2317,3887 2342,3887 2367,3887 2525,3887 2550,3887 2575,3887 2600,3887 2625,3887 2410,3902 2482,3902 2267,3923 2292,3923 2317,3923 2342,3923 2367,3923 2392,3923 2500,3923 2525,3923 2550,3923 2575,3923 2600,3923 2625,3923 4872,4661 4908,4661 8168,4661 8204,4661 4872,4686 4908,4686 8168,4686 8204,4686 4872,4711 4908,4711 8168,4711 8204,4711 4872,4736 4908,4736 8168,4736 8204,4736 4872,4761 4908,4761 8168,4761 8204,4761 4872,4786 4908,4786 8168,4786 8204,4786 4924,4808 8152,4808 4872,4811 8204,4811 4942,4826 8134,4826 4893,4829 8183,4829 4965,4843 4990,4843 5015,4843 5040,4843 5065,4843 5090,4843 5115,4843 5140,4843 5165,4843 5190,4843 5215,4843 5240,4843 5265,4843 5290,4843 5315,4843 5340,4843 5365,4843 5390,4843 5415,4843 5440,4843 5465,4843 5490,4843 5515,4843 5540,4843 5565,4843 5590,4843 5615,4843 5640,4843 5665,4843 5690,4843 5715,4843 5740,4843 5765,4843 5790,4843 5815,4843 5840,4843 5865,4843 5890,4843 5915,4843 5940,4843 5965,4843 5990,4843 6015,4843 6040,4843 6065,4843 6090,4843 6115,4843 6140,4843 6165,4843 6190,4843 6215,4843 6240,4843 6265,4843 6290,4843 6315,4843 6340,4843 6365,4843 6390,4843 6415,4843 6440,4843 6465,4843 6490,4843 6515,4843 6540,4843 6565,4843 6590,4843 6615,4843 6640,4843 6665,4843 6690,4843 6715,4843 6740,4843 6765,4843 6790,4843 6815,4843 6840,4843 6865,4843 6890,4843 6915,4843 6940,4843 6965,4843 6990,4843 7015,4843 7040,4843 7065,4843 7090,4843 7115,4843 7140,4843 7165,4843 7190,4843 7215,4843 7240,4843 7265,4843 7290,4843 7315,4843 7340,4843 7365,4843 7390,4843 7415,4843 7440,4843 7465,4843 7490,4843 7515,4843 7540,4843 7565,4843 7590,4843 7615,4843 7640,4843 7665,4843 7690,4843 7715,4843 7740,4843 7765,4843 7790,4843 7815,4843 7840,4843 7865,4843 7890,4843 7915,4843 7940,4843 7965,4843 7990,4843 8015,4843 8040,4843 8065,4843 8090,4843 8116,4843 4911,4847 8165,4847 4929,4865 8147,4865 4911,4883 8165,4883 4965,4887 4990,4887 5015,4887 5040,4887 5065,4887 5090,4887 5115,4887 5140,4887 5165,4887 5190,4887 5215,4887 5240,4887 5265,4887 5290,4887 5315,4887 5340,4887 5365,4887 5390,4887 5415,4887 5440,4887 5465,4887 5490,4887 5515,4887 5540,4887 5565,4887 5590,4887 5615,4887 5640,4887 5665,4887 5690,4887 5715,4887 5740,4887 5765,4887 5790,4887 5815,4887 5840,4887 5865,4887 5890,4887 5915,4887 5940,4887 5965,4887 5990,4887 6015,4887 6040,4887 6065,4887 6090,4887 6115,4887 6140,4887 6165,4887 6190,4887 6215,4887 6240,4887 6265,4887 6290,4887 6315,4887 6340,4887 6365,4887 6390,4887 6415,4887 6440,4887 6465,4887 6490,4887 6515,4887 6540,4887 6565,4887 6590,4887 6615,4887 6640,4887 6665,4887 6690,4887 6715,4887 6740,4887 6765,4887 6790,4887 6815,4887 6840,4887 6865,4887 6890,4887 6915,4887 6940,4887 6965,4887 6990,4887 7015,4887 7040,4887 7065,4887 7090,4887 7115,4887 7140,4887 7165,4887 7190,4887 7215,4887 7240,4887 7265,4887 7290,4887 7315,4887 7340,4887 7365,4887 7390,4887 7415,4887 7440,4887 7465,4887 7490,4887 7515,4887 7540,4887 7565,4887 7590,4887 7615,4887 7640,4887 7665,4887 7690,4887 7715,4887 7740,4887 7765,4887 7790,4887 7815,4887 7840,4887 7865,4887 7890,4887 7915,4887 7940,4887 7965,4887 7990,4887 8015,4887 8040,4887 8065,4887 8090,4887 8116,4887 4893,4901 8183,4901 4942,4904 8134,4904 4872,4919 8204,4919 4924,4922 8152,4922 4872,4944 4908,4944 8168,4944 8204,4944 4872,4969 4908,4969 8168,4969 8204,4969 4872,4994 4908,4994 8168,4994 8204,4994 4872,5019 4908,5019 8168,5019 8204,5019 4872,5044 4908,5044 8168,5044 8204,5044 4872,5069 4908,5069 8168,5069 8204,5069 4968.25,5623.75 4993.25,5623.75 5018.25,5623.75 5043.25,5623.75 5068.25,5623.75 5093.25,5623.75 5118.25,5623.75 5143.25,5623.75 5168.25,5623.75 5193.25,5623.75 5218.25,5623.75 5243.25,5623.75 5268.25,5623.75 5293.25,5623.75 5318.25,5623.75 5343.25,5623.75 5368.25,5623.75 5393.25,5623.75 5418.25,5623.75 5443.25,5623.75 5468.25,5623.75 5493.25,5623.75 5518.25,5623.75 5543.25,5623.75 5568.25,5623.75 5593.25,5623.75 5618.25,5623.75 5643.25,5623.75 5668.25,5623.75 5693.25,5623.75 5718.25,5623.75 5743.25,5623.75 5768.25,5623.75 5793.25,5623.75 5818.25,5623.75 5843.25,5623.75 5868.25,5623.75 5893.25,5623.75 5918.25,5623.75 5943.25,5623.75 5968.25,5623.75 5993.25,5623.75 6018.25,5623.75 6043.25,5623.75 6068.25,5623.75 6093.25,5623.75 6118.25,5623.75 6143.25,5623.75 6168.25,5623.75 6193.25,5623.75 6218.25,5623.75 6243.25,5623.75 6268.25,5623.75 6293.25,5623.75 6318.25,5623.75 6343.25,5623.75 6368.25,5623.75 6393.25,5623.75 6418.25,5623.75 6443.25,5623.75 6468.25,5623.75 6493.25,5623.75 6518.25,5623.75 6543.25,5623.75 6568.25,5623.75 6593.25,5623.75 6618.25,5623.75 6643.25,5623.75 6668.25,5623.75 6693.25,5623.75 6718.25,5623.75 6743.25,5623.75 6768.25,5623.75 6793.25,5623.75 6818.25,5623.75 6843.25,5623.75 6868.25,5623.75 6893.25,5623.75 6918.25,5623.75 6943.25,5623.75 6968.25,5623.75 6993.25,5623.75 7018.25,5623.75 7043.25,5623.75 7068.25,5623.75 7093.25,5623.75 7118.25,5623.75 7143.25,5623.75 7168.25,5623.75 7193.25,5623.75 7218.25,5623.75 7243.25,5623.75 7268.25,5623.75 7293.25,5623.75 7318.25,5623.75 7343.25,5623.75 7368.25,5623.75 7393.25,5623.75 7418.25,5623.75 7443.25,5623.75 7468.25,5623.75 7493.25,5623.75 7518.25,5623.75 7543.25,5623.75 7568.25,5623.75 7593.25,5623.75 7618.25,5623.75 7643.25,5623.75 7668.25,5623.75 7693.25,5623.75 7718.25,5623.75 7743.25,5623.75 7768.25,5623.75 7793.25,5623.75 7818.25,5623.75 7843.25,5623.75 7868.25,5623.75 7893.25,5623.75 7918.25,5623.75 7943.25,5623.75 7968.25,5623.75 7993.25,5623.75 8018.25,5623.75 8043.25,5623.75 8068.25,5623.75 8093.25,5623.75 8118.25,5623.75 8143.25,5623.75 4968.25,5658.25 4993.25,5658.25 5018.25,5658.25 5043.25,5658.25 5068.25,5658.25 5093.25,5658.25 5118.25,5658.25 5143.25,5658.25 5168.25,5658.25 5193.25,5658.25 5218.25,5658.25 5243.25,5658.25 5268.25,5658.25 5293.25,5658.25 5318.25,5658.25 5343.25,5658.25 5368.25,5658.25 5393.25,5658.25 5418.25,5658.25 5443.25,5658.25 5468.25,5658.25 5493.25,5658.25 5518.25,5658.25 5543.25,5658.25 5568.25,5658.25 5593.25,5658.25 5618.25,5658.25 5643.25,5658.25 5668.25,5658.25 5693.25,5658.25 5718.25,5658.25 5743.25,5658.25 5768.25,5658.25 5793.25,5658.25 5818.25,5658.25 5843.25,5658.25 5868.25,5658.25 5893.25,5658.25 5918.25,5658.25 5943.25,5658.25 5968.25,5658.25 5993.25,5658.25 6018.25,5658.25 6043.25,5658.25 6068.25,5658.25 6093.25,5658.25 6118.25,5658.25 6143.25,5658.25 6168.25,5658.25 6193.25,5658.25 6218.25,5658.25 6243.25,5658.25 6268.25,5658.25 6293.25,5658.25 6318.25,5658.25 6343.25,5658.25 6368.25,5658.25 6393.25,5658.25 6418.25,5658.25 6443.25,5658.25 6468.25,5658.25 6493.25,5658.25 6518.25,5658.25 6543.25,5658.25 6568.25,5658.25 6593.25,5658.25 6618.25,5658.25 6643.25,5658.25 6668.25,5658.25 6693.25,5658.25 6718.25,5658.25 6743.25,5658.25 6768.25,5658.25 6793.25,5658.25 6818.25,5658.25 6843.25,5658.25 6868.25,5658.25 6893.25,5658.25 6918.25,5658.25 6943.25,5658.25 6968.25,5658.25 6993.25,5658.25 7018.25,5658.25 7043.25,5658.25 7068.25,5658.25 7093.25,5658.25 7118.25,5658.25 7143.25,5658.25 7168.25,5658.25 7193.25,5658.25 7218.25,5658.25 7243.25,5658.25 7268.25,5658.25 7293.25,5658.25 7318.25,5658.25 7343.25,5658.25 7368.25,5658.25 7393.25,5658.25 7418.25,5658.25 7443.25,5658.25 7468.25,5658.25 7493.25,5658.25 7518.25,5658.25 7543.25,5658.25 7568.25,5658.25 7593.25,5658.25 7618.25,5658.25 7643.25,5658.25 7668.25,5658.25 7693.25,5658.25 7718.25,5658.25 7743.25,5658.25 7768.25,5658.25 7793.25,5658.25 7818.25,5658.25 7843.25,5658.25 7868.25,5658.25 7893.25,5658.25 7918.25,5658.25 7943.25,5658.25 7968.25,5658.25 7993.25,5658.25 8018.25,5658.25 8043.25,5658.25 8068.25,5658.25 8093.25,5658.25 8118.25,5658.25 8143.25,5658.25
  other v3: 630,4495 670,4495 710,4495 750,4495 790,4495 830,4495 870,4495 910,4495 950,4495 990,4495 3926,4495 3966,4495 4006,4495 4046,4495 4086,4495 4126,4495 4166,4495 4206,4495 4246,4495 4286,4495 4711,4495 4751,4495 4791,4495 4831,4495 4871,4495 4911,4495 4951,4495 4991,4495 5031,4495 5071,4495 8006,4495 8046,4495 8086,4495 8126,4495 8166,4495 8206,4495 8246,4495 8286,4495 8326,4495 8366,4495 630,4535 670,4535 710,4535 750,4535 790,4535 830,4535 870,4535 910,4535 950,4535 990,4535 3926,4535 3966,4535 4006,4535 4046,4535 4086,4535 4126,4535 4166,4535 4206,4535 4246,4535 4286,4535 4711,4535 4751,4535 4791,4535 4831,4535 4871,4535 4911,4535 4951,4535 4991,4535 5031,4535 5071,4535 8006,4535 8046,4535 8086,4535 8126,4535 8166,4535 8206,4535 8246,4535 8286,4535 8326,4535 8366,4535 750,4575 870,4575 4046,4575 4166,4575 4831,4575 4951,4575 8126,4575 8246,4575 630,4655 670,4655 710,4655 910,4655 950,4655 990,4655 3926,4655 3966,4655 4006,4655 4206,4655 4246,4655 4286,4655 4711,4655 4751,4655 4791,4655 4991,4655 5031,4655 5071,4655 8006,4655 8046,4655 8086,4655 8286,4655 8366,4655 630,4695 670,4695 710,4695 910,4695 950,4695 990,4695 3926,4695 3966,4695 4006,4695 4206,4695 4246,4695 4286,4695 4711,4695 4751,4695 4791,4695 4991,4695 5031,4695 5071,4695 8006,4695 8046,4695 8086,4695 8286,4695 8366,4695 630,5035 670,5035 710,5035 910,5035 950,5035 990,5035 3926,5035 3966,5035 4006,5035 4206,5035 4246,5035 4286,5035 4710,5035 4750,5035 4790,5035 4990,5035 5030,5035 5070,5035 8006,5035 8046,5035 8086,5035 8286,5035 8366,5035 630,5075 670,5075 710,5075 910,5075 950,5075 990,5075 3926,5075 3966,5075 4006,5075 4206,5075 4246,5075 4286,5075 4710,5075 4750,5075 4790,5075 4990,5075 5030,5075 5070,5075 8006,5075 8046,5075 8086,5075 8286,5075 8366,5075 750,5155 870,5155 4046,5155 4166,5155 4830,5155 4950,5155 8126,5155 8246,5155 630,5195 670,5195 710,5195 750,5195 790,5195 830,5195 870,5195 910,5195 950,5195 990,5195 3926,5195 3966,5195 4006,5195 4046,5195 4086,5195 4126,5195 4166,5195 4206,5195 4246,5195 4286,5195 4710,5195 4750,5195 4790,5195 4830,5195 4870,5195 4910,5195 4950,5195 4990,5195 5030,5195 5070,5195 8006,5195 8046,5195 8086,5195 8126,5195 8166,5195 8206,5195 8246,5195 8286,5195 8326,5195 8366,5195 630,5235 670,5235 710,5235 750,5235 790,5235 830,5235 870,5235 910,5235 950,5235 990,5235 3926,5235 3966,5235 4006,5235 4046,5235 4086,5235 4126,5235 4166,5235 4206,5235 4246,5235 4286,5235 8006,5235 8046,5235 8086,5235 8126,5235 8166,5235 8206,5235 8246,5235 8286,5235 8326,5235 8366,5235 4003,5446 4043,5446 4163,5446 4203,5446 696,5447 736,5447 856,5447 896,5447 4807,5461 4847,5461 4967,5461 5007,5461 8113.5,5461 8153.5,5461 8273.5,5461 8313.5,5461 4003,5486 4043,5486 4163,5486 4203,5486 696,5487 736,5487 856,5487 896,5487 4807,5501 4847,5501 4967,5501 5007,5501 8113.5,5501 8153.5,5501 8273.5,5501 8313.5,5501 4003,5526 4043,5526 4163,5526 4203,5526 696,5527 736,5527 856,5527 896,5527 4807,5541 4847,5541 4967,5541 5007,5541 8113.5,5541 8153.5,5541 8273.5,5541 8313.5,5541 4123,5566 4163,5566 4203,5566 696,5567 736,5567 776,5567 4807,5581 4847,5581 4887,5581 8233.5,5581 8273.5,5581 8313.5,5581 4163,5606 4203,5606 696,5607 736,5607 4807,5621 4847,5621 8273.5,5621 8313.5,5621 4163,5646 4203,5646 696,5647 736,5647 4807,5661 4847,5661 8273.5,5661 8313.5,5661 4123,5686 4163,5686 4203,5686 696,5687 736,5687 776,5687 4807,5701 4847,5701 4887,5701 8233.5,5701 8273.5,5701 8313.5,5701 4003,5726 4043,5726 4163,5726 4203,5726 696,5727 736,5727 856,5727 896,5727 4807,5741 4847,5741 4967,5741 5007,5741 8113.5,5741 8153.5,5741 8273.5,5741 8313.5,5741 4003,5766 4043,5766 4163,5766 4203,5766 696,5767 736,5767 856,5767 896,5767 4807,5781 4847,5781 4967,5781 5007,5781 8113.5,5781 8153.5,5781 8273.5,5781 8313.5,5781 4003,5806 4043,5806 4163,5806 4203,5806 696,5807 736,5807 856,5807 896,5807 4807,5821 4847,5821 4967,5821 5007,5821 8113.5,5821 8153.5,5821 8273.5,5821 8313.5,5821
  other v4: 810,4560 4106,4560 4891,4560 8186,4560 782,4573 838,4573 4078,4573 4134,4573 4863,4573 4919,4573 8158,4573 8214,4573 775,4601 845,4601 4071,4601 4141,4601 4856,4601 4926,4601 8151,4601 8221,4601 762,4625 858,4625 4058,4625 4154,4625 4843,4625 4939,4625 8138,4625 8234,4625 740,4649 880,4649 4036,4649 4176,4649 4821,4649 4961,4649 8116,4649 8256,4649 740,4677 880,4677 4036,4677 4176,4677 4821,4677 4961,4677 8116,4677 8256,4677 740,4705 880,4705 4036,4705 4176,4705 4821,4705 4961,4705 8116,4705 8256,4705 740,5025 880,5025 4036,5025 4176,5025 4820,5025 4960,5025 8116,5025 8256,5025 740,5053 880,5053 4036,5053 4176,5053 4820,5053 4960,5053 8116,5053 8256,5053 740,5081 880,5081 4036,5081 4176,5081 4820,5081 4960,5081 8116,5081 8256,5081 762,5105 858,5105 4058,5105 4154,5105 4842,5105 4938,5105 8138,5105 8234,5105 775,5129 845,5129 4071,5129 4141,5129 4855,5129 4925,5129 8151,5129 8221,5129 782,5157 838,5157 4078,5157 4134,5157 4862,5157 4918,5157 8158,5157 8214,5157 810,5170 4106,5170 4890,5170 8186,5170 3993,5556 4021,5556 4049,5556 850,5557 878,5557 906,5557 4961,5571 4989,5571 5017,5571 8103.5,5571 8131.5,5571 8159.5,5571 4073,5578 826,5579 4097,5591 802,5592 4937,5593 8183.5,5593 4125,5598 774,5599 4913,5606 8207.5,5606 4885,5613 8235.5,5613 4138,5626 761,5627 4872,5641 8248.5,5641 4125,5654 774,5655 4097,5661 802,5662 4885,5669 8235.5,5669 4073,5674 826,5675 4913,5676 8207.5,5676 4937,5689 8183.5,5689 3993,5696 4021,5696 4049,5696 850,5697 878,5697 906,5697 4961,5711 4989,5711 5017,5711 8103.5,5711 8131.5,5711 8159.5,5711
  other v5: 4528.48,1742.94 4528.48,2579.01 4528.48,3459.01
  other v6: 4104.5,160 4204.5,160 4304.5,160 4404.5,160 4504.5,160 4104.5,260 4204.5,260 4304.5,260 4404.5,260 4504.5,260 4104.5,360 4204.5,360 4304.5,360 4404.5,360 4504.5,360 4104.5,460 4204.5,460 4304.5,460 4404.5,460 4504.5,460 4104.5,560 4204.5,560 4304.5,560 4404.5,560 4504.5,560
IREF0: C9.2 C17.2 H10.1 R5.1 | length 1908.6
  Top Layer w20: R5.1@6579.03,2310 6579.03,2156.97 C17.2@6577.06,2155 6577.06,2125.15 6577.59,2124.62 6577.59,2041.91 v5(6579.5,2040) ; v5@7839.5,2280 H10.1@8049.5,2280
  Bottom Layer w20: v5(6579.5,2040) 6664.5,2040 6694.5,2070 6694.5,2185 6789.5,2280 v5@7839.5,2280
  other v5: 7844.5,2280
IREF0_M: H9.1 R5.2 | length 830.4
  Top Layer w20: H9.1@5829.5,2280 5829.5,2350 5869.5,2390 6474.5,2390 6519.97,2344.53 R5.2@6519.97,2310
IREF1: C10.2 C18.2 H10.2 R6.1 | length 1442.5
  Top Layer w20: v5@6934.5,2040 v5(6937.36,2042.86) R6.1@6937.36,2310 ; v5(7844.5,2180) H10.2@8049.5,2180
  Bottom Layer w20: v5(6937.36,2042.86) 6939.27,2040.95 6946.35,2040.95 6947.29,2040 7064.5,2040 7159.5,2135 7164.5,2135 7209.5,2180 v5(7844.5,2180)
IREF1_M: H9.2 R6.2 | length 1658.7
  Top Layer w20: H9.2@5829.5,2180 5689.5,2180 5664.5,2205 5664.5,2365 5729.5,2430 6814.5,2430 6874.5,2370 6874.5,2313.81 R6.2@6878.31,2310
IREF2: C11.2 C19.2 H10.3 R7.1 | length 1033.6
  Top Layer w20: v5(7294.5,2050) 7293.73,2050.77 C19.2@7293.73,2155 7295.69,2156.97 R7.1@7295.69,2310 ; v5@7839.5,2080 H10.3@8049.5,2080
  Bottom Layer w20: v5(7294.5,2050) 7414.5,2050 7444.5,2080 v5@7839.5,2080 ; v5@7842,2080 v5@7847,2080
  other v5: 7844.5,2080
IREF2_M: H9.3 R7.2 | length 2255.8
  Top Layer w20: H9.3@5829.5,2080 5674.5,2080 5619.5,2135 5619.5,2385 5704.5,2470 7169.5,2470 7236.64,2402.86 R7.2@7236.64,2310
IREF3: C12.2 C20.2 H10.4 R8.1 | length 709.5
  Top Layer w20: R8.1@7654.03,2310 7654.03,2230 7654.03,2156.97 C20.2@7652.06,2155 7652.06,2097.44 7769.5,1980 H10.4@8049.5,1980 H10.4@8099.5,1980